# Altium PCB 2_iip_rbf.PcbDoc
Units mm, origin at the board's own origin, x right, y up, seen from the top; angles counter-clockwise.
Board outline 67.5 x 28 mm, 2 copper layers (Top Layer, Bottom Layer), stack 1.571 mm thick; 16 components, 13 nets, 74 pads, 8 vias.
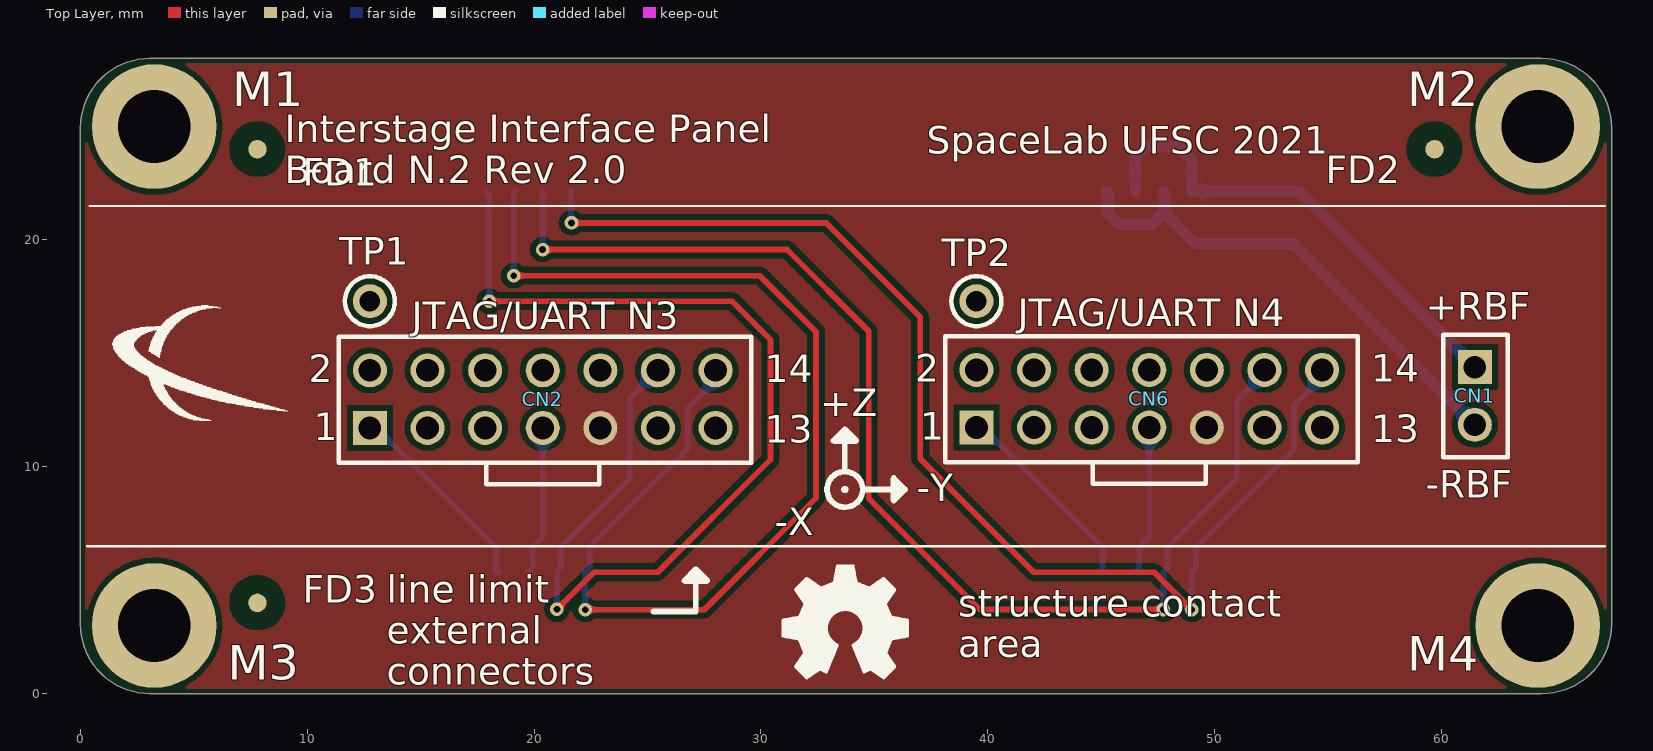
[diagram p0: Top Layer view]
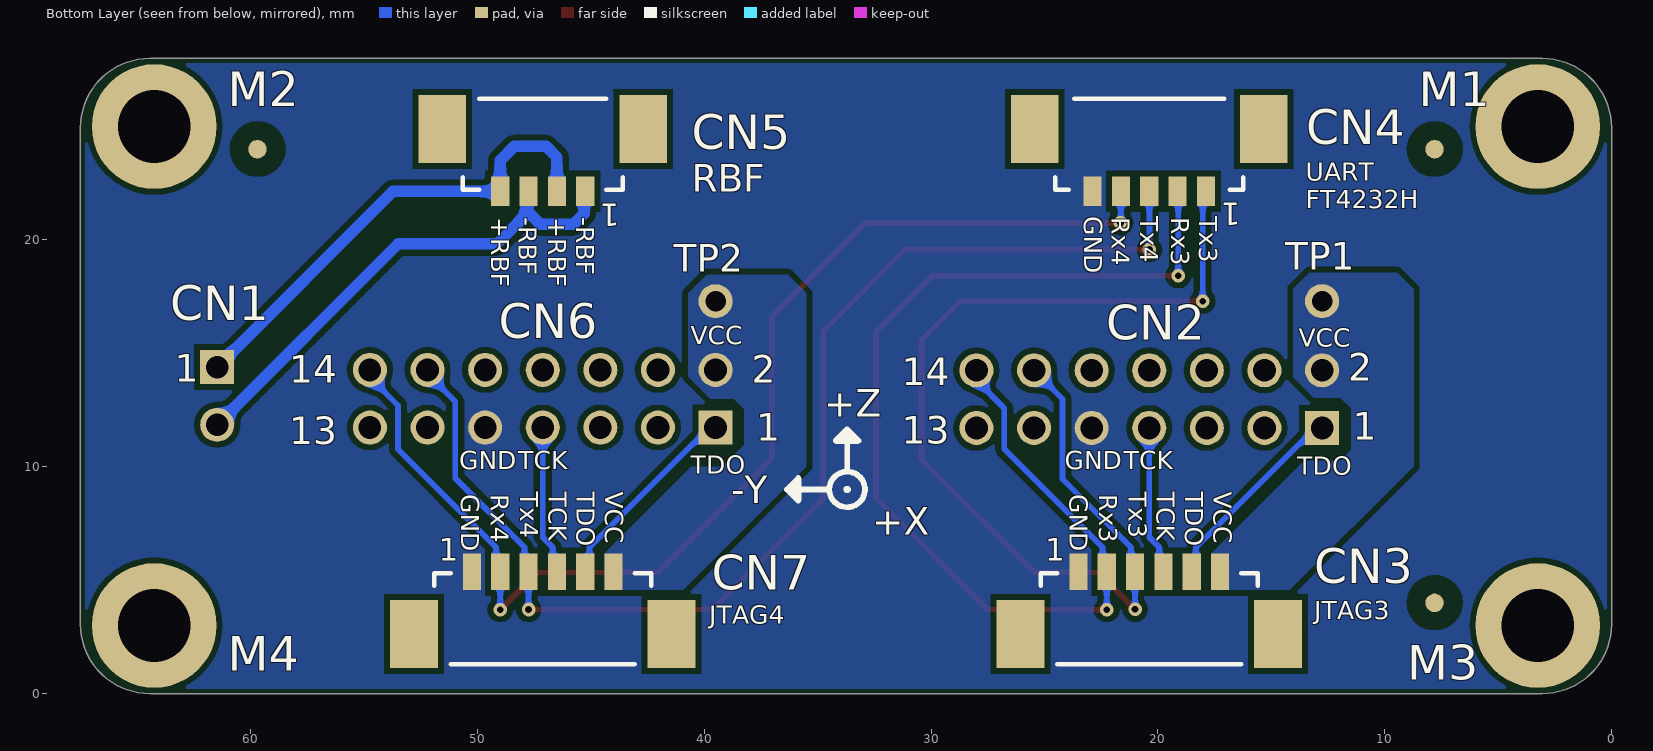
[diagram p1: Bottom Layer view, seen from below]
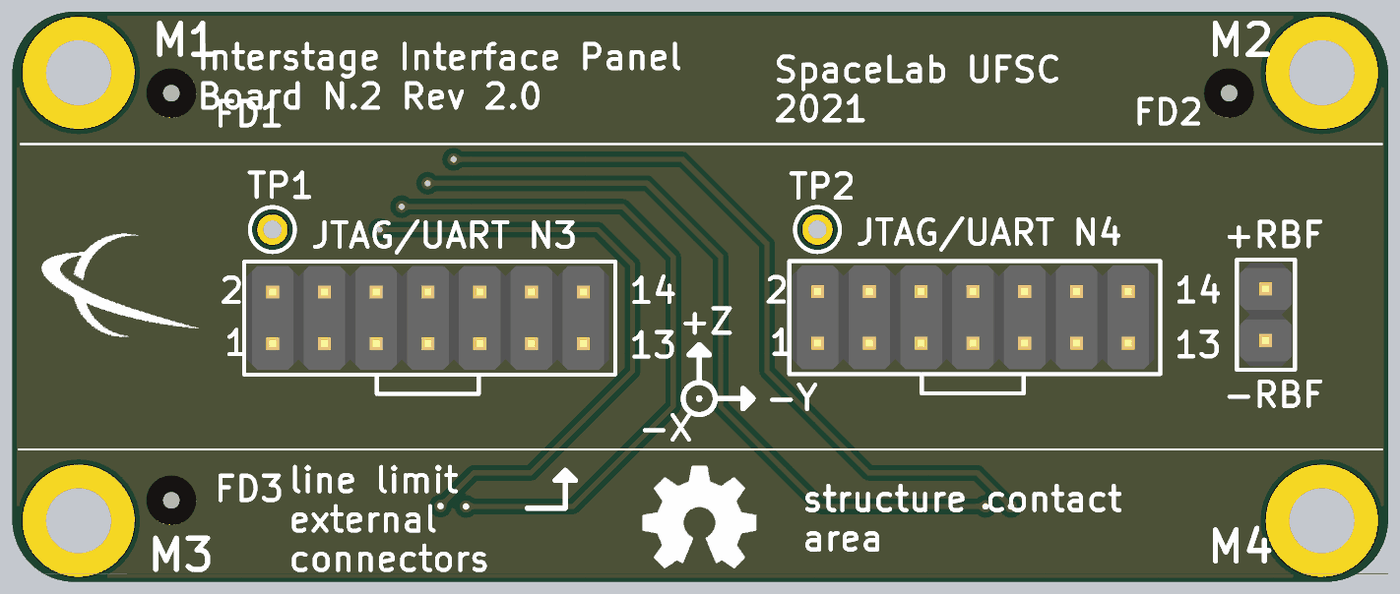
[diagram p2: 3D render of the assembled board from above, using the file's embedded part models]
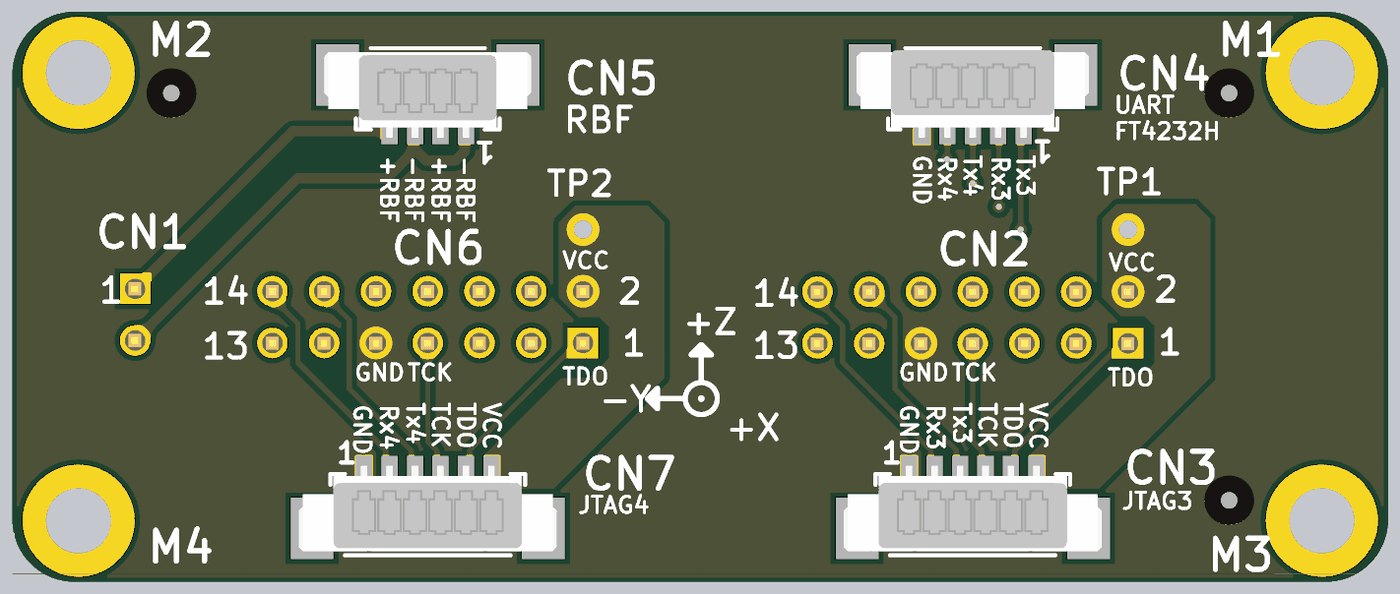
[diagram p3: 3D render of the assembled board from below, using the file's embedded part models]

## Layer stack, top to bottom
Top Solder: solder mask 0.0102, Solder Resist, Dk 3.5
Top Layer: signal copper 0.0356
Dielectric 1: dielectric 1.5, FR-4, Dk 4.8
Bottom Layer: signal copper 0.0356
Bottom Solder: solder mask 0.0102, Solder Resist, Dk 3.5

## Board outline
0,3.048 ccw(c3.048,3.048) 3.048,0 64.452,0 ccw(c64.452,3.048) 67.5,3.048 67.5,24.952 ccw(c64.452,24.952) 64.452,28 3.048,28 ccw(c3.048,24.952) 0,24.952

## Design rules (kind name [scope] priority, off if disabled: settings)
BoardOutlineClearance BoardOutlineClearance_JLCPCB [All] p1: gap=0.2 ignorepadtopadclearanceinfootprint=FALSE
BoardOutlineClearance [All] p2: gap=0.254 ignorepadtopadclearanceinfootprint=FALSE except(0: Arc-SplitContinuation Track-SplitContinuation SMDPad-SplitContinuation THPad-SplitContinuation Via-SplitContinuation Fill-SplitContinuation Poly-SplitContinuation Region-SplitContinuation Text-SplitContinuation)
Clearance Clearance_JLCPCB_capabilities [All] p1: gap=0.254 ignorepadtopadclearanceinfootprint=FALSE except(0: SMDPad-Hole THPad-Hole Via-Hole Fill-Hole Poly-Hole Region-Hole Text-Hole; 0.127: Arc-Arc Arc-Track Track-Track SMDPad-SMDPad; 0.15: SMDPad-Text THPad-Text; 0.152: SMDPad-THPad; 0.2: Arc-SMDPad Track-SMDPad; 0.33: Arc-THPad Track-THPad; 0.54: THPad-THPad) // Minimal clearances considering JLCPCB manufacturing
Clearance [All] p2: gap=0.254 ignorepadtopadclearanceinfootprint=FALSE except(0: Arc-Hole Track-Hole SMDPad-Hole THPad-Hole Via-Hole Fill-Hole Poly-Hole Region-Hole Text-Hole) // Default altium designer clearence rule
HoleSize HoleSize_JLCPCB_capabilities [All] p1: absolutevalues=TRUE maxlimit=6.3 minlimit=0.3 maxpercent=80.000 minpercent=20.000
HoleSize [All] p2: absolutevalues=TRUE maxlimit=2.54 minlimit=0.025 maxpercent=80.000 minpercent=20.000
HoleToHoleClearance HoleToHoleClearance_JLCPCB [All] p1: gap=0.54 allowstackedmicrovias=TRUE
HoleToHoleClearance [All] p2: gap=0.254 allowstackedmicrovias=TRUE
MinimumAnnularRing AnnularRing_JLCPCB_1oz_capabilities [All] p1: minimumring=0.13
MinimumAnnularRing [All] p2: minimumring=0.254
MinimumSolderMaskSliver MinimumSolderMaskSliver_JLCPCB [All] p1: minsoldermaskwidth=0.2
MinimumSolderMaskSliver [All] p2: minsoldermaskwidth=0.254
PolygonConnect PolygonConnect_GND [InNet('GND')] p1: connectstyle=Direct reliefconductorwidth=0.254 reliefentries=4 polygonreliefangle="90 Angle" airgapwidth=0.254
PolygonConnect PolygonConnect_Power [(InNet('JTAG3_VCC') OR InNet('JTAG4_VCC'))] p2: connectstyle=Direct reliefconductorwidth=0.254 reliefentries=4 polygonreliefangle="90 Angle" airgapwidth=0.254 // Power polygons for power nets (debugger and battery charger)
PolygonConnect [All] p3: connectstyle=Relief reliefconductorwidth=0.254 reliefentries=4 polygonreliefangle="90 Angle" airgapwidth=0.254
RoutingVias RoutingVias_JLCPCB_capabilities [All] p1: holewidth=0.3 width=0.6 viastyle="Through Hole" minholewidth=0.3 minwidth=0.6 maxholewidth=0.711 maxwidth=1.27
RoutingVias [All] p2: holewidth=0.711 width=1.27 viastyle="Through Hole" minholewidth=0.711 minwidth=1.27 maxholewidth=0.711 maxwidth=1.27
SilkToSolderMaskClearance SilkToSolderMaskClearance_JLCPCB [IsPad] p1: minsilkscreentomaskgap=0.15 clearancetoexposedcopper=TRUE
SilkToSolderMaskClearance [IsPad] p2: minsilkscreentomaskgap=0.254 clearancetoexposedcopper=TRUE
SolderMaskExpansion SolderMaskExpansion_JLCPCB [All] p1: expansion=0.05
SolderMaskExpansion [All] p2: expansion=0.102
Width Width_JLCPCB_capabilities [All] p1: maxlimit=0.508 minlimit=0.127 preferedwidth=0.254 minimp=50.000000 maximp=50.000000 favimp=50.000000 // Width considering JLCPCB manufacturing
Width [All] p2: maxlimit=0.254 minlimit=0.254 preferedwidth=0.254
26 further rules are at their usual default settings.

## Classes and differential pairs
component class 0_Architecture: FD1 FD2 FD3 M1 M2 M3 M4
component class 2_iip_rbf: CN1 CN2 CN3 CN4 CN5 CN6 CN7 CN13 TP1 TP2

## Components (designator, comment, footprint, x,y, rotation, side; value= is the part's Value field where it differs from the comment)
CN1 "2 POS Pin Header" "CONN HEADER VERT 2POS 2.54mm" 61.475,13.12 r270 top
CN2 "7 POS dual line Pin Header 2.54mm" "CONN HEADER VERT 14POS 2.54MM" 20.38,12.98 r0 top
CN3 "6 pin Picoblade" "PICO BLADE 0533980671" 20.38,4 r180 bottom
CN4 "5 pin PicoBlade" "PICO BLADE 0533980571" 20.38,23.516 r0 bottom
CN5 "4 pin Picoblade" "PICO BLADE 0533980471" 47.12,23.516 r0 bottom value=0533980471
CN6 "7 POS dual line Pin Header 2.54mm" "CONN HEADER VERT 14POS 2.54MM" 47.12,13 r0 top
CN7 "6 pin Picoblade" "PICO BLADE 0533980671" 47.12,4 r180 bottom
FD1 "Fiducial 1.3" "FIDUCIAL 1.3MM" 7.8,24 r0 top
FD2 "Fiducial 1.3" "FIDUCIAL 1.3MM" 59.7,24 r0 top
FD3 "Fiducial 1.3" "FIDUCIAL 1.3MM" 7.8,4 r0 top
M1 "IB Mechanical Hole" "M3 hole (5.5mm pad)"#1 3.25,25 r0 top
M2 "IB Mechanical Hole" "M3 hole (5.5mm pad)"#1 64.25,25 r0 top
M3 "IB Mechanical Hole" "M3 hole (5.5mm pad)"#2 3.25,2 r0 top
M4 "IB Mechanical Hole" "M3 hole (5.5mm pad)"#2 64.25,2 r0 top
TP1 "DNP" "TEST POINT PTH" 12.76,17.301 r0 top
TP2 "DNP" "TEST POINT PTH" 39.5,17.301 r0 top

## Footprints (in the part's own frame and the unit in brackets; to place one, negate y for a bottom-side part, rotate by r counter-clockwise, add the part's x,y. Pads: shape width x height; smd on the part's side, far side on the other; paste and mask are expansions set on the pad)
"CONN HEADER VERT 2POS 2.54mm" [mm]
  rect 1.5x1.5 hole 1: 1(-1.27,0)
  round 1.5 hole 1: 2(1.27,0)
  silkscreen extent -2.7,-1.4 2.7,1.45, body extent -2.54,-1.25 2.54,1.29, height 8.65
"CONN HEADER VERT 14POS 2.54MM" [mm]
  rect 1.5x1.5 hole 1: 1(-7.62,-1.27)
  round 1.5 hole 1: 2(-7.62,1.27) 3(-5.08,-1.27) 4(-5.08,1.27) 5(-2.54,-1.27) 6(-2.54,1.27) 7(0,-1.27) 8(0,1.27) 9(2.54,-1.27) 10(2.54,1.27) 11(5.08,-1.27) 12(5.08,1.27) 13(7.62,-1.27) 14(7.62,1.27)
  silkscreen extent -9,-2.8 9.2,2.75, body extent -8.88,-2.55 8.9,2.53, height 8.65
"FIDUCIAL 1.3MM" [mil]
  round 32 smd far side: ""(0,0)
  round 32 on Bottom Solder: ""(0,0)
  round 32 smd: ""(0,0)
  Top Layer pour cut-out: -48.23,-6.89 -45.31,17.58 -30.69,37.43 -8.18,47.47 16.35,45.09 36.52,30.91 47.05,8.63 45.22,-15.95 31.5,-36.42 31.5,-36.42 8.41,-46.85 -16.81,-44.45 -37.51,-29.85 -48.23,-6.89
  Bottom Layer pour cut-out: -48.23,-6.89 -45.31,17.58 -30.69,37.43 -8.18,47.47 16.35,45.09 36.52,30.91 47.05,8.63 45.22,-15.95 31.5,-36.42 31.5,-36.42 8.41,-46.85 -16.81,-44.45 -37.51,-29.85 -48.23,-6.89
"M3 hole (5.5mm pad)"#1 [mm]
  round 5.5 hole 3.2: 0(0,0)
"M3 hole (5.5mm pad)"#2 [mm]
  round 5.5 hole 3.2: 0(0,1)
"PICO BLADE 0533980471" [mm]
  rect 2.1x3 smd: 0(-4.425,-1.375) 0(4.425,-1.375)
  rect 0.8x1.3 smd: 1(-1.875,1.375) 2(-0.625,1.375) 3(0.625,1.375) 4(1.875,1.375)
  silkscreen extent -3.52,-2.7 3.52,1.3, body extent -5.07,-2.5 5.07,1.7, height 5.88
"PICO BLADE 0533980571" [mm]
  rect 2.1x3 smd: 0(-5.05,-1.375) 0(5.05,-1.375)
  rect 0.8x1.3 smd: 1(-2.5,1.375) 2(-1.25,1.375) 3(0,1.375) 4(1.25,1.375) 5(2.5,1.375)
  silkscreen extent -4.15,-2.7 4.15,1.3, body extent -5.7,-2.6 5.7,1.7, height 5.87
"PICO BLADE 0533980671" [mm] "CONN HEADER SMD 6POS 1.25MM"
  rect 2.1x3 smd: 0(-5.675,-1.375) 0(5.675,-1.375)
  rect 0.8x1.6 smd: 1(-3.125,1.375) 2(-1.875,1.375) 3(-0.625,1.375) 4(0.625,1.375) 5(1.875,1.375) 6(3.125,1.375)
  silkscreen extent -4.77,-2.7 4.77,1.3, body extent -6.32,-2.5 6.32,1.7, height 5.87
"TEST POINT PTH" [mm]
  round 1.5 hole 0.9: 1(0,0)
  silkscreen extent -1.1,-1.1 1.1,1.1

## Part data
CN1: library part M20-9990245, "M20 HDR, PIN, SIL, VERT, 2W", Case/Package=SIL, Color=Black, Contact Resistance=25mR, Current=3A, Insulation Resistance=10GR, Manufacturer=Harwin, Max Operating Temperature=105°C, Min Operating Temperature=-40°C, Package Quantity=1000, Supplier Part Number 1=952-2261-ND, Voltage=50V, Voltage Rating (AC)=750V, ComponentLink1Description=http://www.farnell.com/datasheets/2368211.pdf?src-supplier=Element14, ComponentLink1URL=http://www.farnell.com/datasheets/2368211.pdf?src-supplier=Element14, ComponentLink2Description=http://uk.rs-online.com/webdocs/1388/0900766b81388728.pdf?src-supplier=RSComponents, ComponentLink2URL=http://uk.rs-online.com/webdocs/1388/0900766b81388728.pdf?src-supplier=RSComponents, ComponentLink3Description=https://cdn.harwin.com/pdfs/Harwin_PC_Connectors_M20.pdf?src-supplier=Digi-Key, ComponentLink3URL=https://cdn.harwin.com/pdfs/Harwin_PC_Connectors_M20.pdf?src-supplier=Digi-Key, ComponentLink4Description=http://www.mouser.com/ds/2/181/Harwin_Product_Catalog_page_206-1134556.pdf?src-supplier=Mouser, ComponentLink4URL=http://www.mouser.com/ds/2/181/Harwin_Product_Catalog_page_206-1134556.pdf?src-supplier=Mouser, Connector Type="Male Pin", Contact Material=Brass,Bronze, Contact Mating Length=0.24inch, Contact Plating=Gold, Current Rating=3A, Depth=2.54mm, Gender=Male, Height=0.12inch, Housing Color=Black, Housing Material=Nylon, Lead Pitch=2.54mm, Length=5.08mm, Manufacturer Part Number=M20-9990245, Mating Cycles=300, Max Current Rating=3A, Mount="Through Hole", Number of Contacts=2, Number of Poles=2, Number of Positions=2, Number of Rows=1, Orientation=Straight, Packaging=Bag, Pitch=2.54mm, Pricing 1="1=0.15, 10=0.136, 100=0.0841, 500=0.0696, 1000=0.0609, 5000=0.0522, 10000=0.05075 (USD)", Pricing 2="1=0.14, 10=0.083, 100=0.069, 1000=0.06, 2000=0.052, 10000=0.05 (USD)", Radiation Hardening=No, REACH SVHC="No SVHC", Stock 1=27298, Stock 2=26881, Supplier 1=Digi-Key, Supplier 2=Mouser, Supplier Part Number 2=855-M20-9990245, Termination=Solder, Weight=0.25lb, Width=0.25inch, Working Voltage=750V
CN2 CN6: library part M20-9980745, "Headers & Wire Housings 07+07 DIL VERTICAL PIN HEADER GOLD HT", Color=Black, Contact Resistance=25mR, Manufacturer=Harwin, Max Current Rating=3A, Max Operating Temperature=105°C, Min Operating Temperature=-40°C, Package Quantity=500, Supplier Part Number 1=952-1932-ND, ComponentLink1Description=https://www.verical.com/server-webapp/html/getDatasheet?partID=468550&src-supplier=Verical, ComponentLink1URL=https://www.verical.com/server-webapp/html/getDatasheet?partID=468550&src-supplier=Verical, ComponentLink2Description=http://www.harwin.com/include/downloads/drawings/M20-998.PDF?src-supplier=Element14, ComponentLink2URL=http://www.harwin.com/include/downloads/drawings/M20-998.PDF?src-supplier=Element14, ComponentLink3Description=http://www.mouser.com/ds/2/181/M20-998-351176.pdf?src-supplier=Mouser, ComponentLink3URL=http://www.mouser.com/ds/2/181/M20-998-351176.pdf?src-supplier=Mouser, Connector Type="Male Pin", Contact Material=Brass, Contact Mating Length=0.24inch, Contact Plating=Gold, Depth=5.08mm, Gender=Male, Housing Color=Black, Housing Material=Nylon, Length=17.78mm, Manufacturer Part Number=M20-9980745, Mount="Through Hole", Number of Contacts=14, Number of Positions=14, Number of Rows=2, Orientation=Straight, Packaging=Bag, Pitch=2.54mm, Pricing 1="1=0.54, 10=0.51, 100=0.391, 500=0.34, 1000=0.2805, 5000=0.2465, 10000=0.2295 (USD)", Pricing 2="1=0.54, 10=0.51, 100=0.387, 500=0.34, 1000=0.28, 2500=0.246 (USD)", Radiation Hardening=No, REACH SVHC="No SVHC", Row Spacing=0.1inch, Stock 1=15564, Stock 2=1790, Supplier 1=Digi-Key, Supplier 2=Mouser, Supplier Part Number 2=855-M20-9980745, Termination=Solder
CN3 CN7: library part 53398-0671, "1.25mm Pitch PicoBlade™ Header, Surface Mount, Vertical, 6 Circuits", Color=Natural, Contact Resistance=20mR, Current Rating=1A, Flammability Rating="UL94 V-0", Insulation Resistance=100MR, Manufacturer=Molex, Max Operating Temperature=85°C, Min Operating Temperature=-40°C, Package Quantity=1000, Supplier Part Number 1=WM7610DKR-ND, Voltage Rating=125V, Body Plating=Tin, ComponentLink1Description=https://www.molex.com/pdm_docs/sd/533980671_sd.pdf?src-supplier=Digi-Key, ComponentLink1URL=https://www.molex.com/pdm_docs/sd/533980671_sd.pdf?src-supplier=Digi-Key, Contact Material=Bronze,Tin, Contact Plating=Tin, Gender=Male, Glow Wire Compliant=Non-compliant, Housing Color=Natural, Housing Material=Nylon, Lead Free="Lead Free", Lead Pitch=1.25mm, Manufacturer Part Number=53398-0671, Mount="Surface Mount", Number of Circuits=6, Number of Contacts=6, Number of Positions=6, Number of Rows=1, Orientation=Vertical, Packaging="Tape and Reel", Pitch=1.25mm, Pricing 1="1=1.39, 10=1.26, 100=1.0802, 500=0.90014 (USD)", Pricing 2="1=1.15, 10=1.01, 100=0.864, 500=0.727, 1000=0.427, 2000=0.374 (USD)", Radiation Hardening=No, REACH SVHC=Unknown, Stock 1=21086, Stock 2=26, Supplier 1=Digi-Key, Supplier 2=Mouser, Supplier Part Number 2=538-53398-0671, Termination=Solder, Voltage Rating (AC)=125V, Voltage Rating (DC)=125V, Working Voltage=125V
CN4: library part 53398-0571, "Wire-To-Board Connector, Vertical, PicoBlade 53398 Series, Surface Mount, Header, 5, 1.25 mm", Color=Natural, Contact Resistance=20mR, Current Rating=1A, Flammability Rating="UL94 V-0", Insulation Resistance=100MR, Manufacturer=Molex, Max Operating Temperature=85°C, Max Voltage Rating (AC)=125V, Min Operating Temperature=-40°C, Package Quantity=1000, Supplier Part Number 1=WM7609CT-ND, Body Plating=Tin, ComponentLink1Description=http://www.molex.com/webdocs/datasheets/pdf/en-us/0533980571_PCB_HEADERS.pdf?src-supplier=Avnet+Europe, ComponentLink1URL=http://www.molex.com/webdocs/datasheets/pdf/en-us/0533980571_PCB_HEADERS.pdf?src-supplier=Avnet+Europe, ComponentLink2Description=http://www.farnell.com/datasheets/2697810.pdf?src-supplier=Newark, ComponentLink2URL=http://www.farnell.com/datasheets/2697810.pdf?src-supplier=Newark, ComponentLink3Description=https://www.distrelec.biz/Web/Downloads/46/_e/gf116833-116846_e.pdf?mime=application%2Fpdf&src-supplier=Distrelec, ComponentLink3URL=https://www.distrelec.biz/Web/Downloads/46/_e/gf116833-116846_e.pdf?mime=application%2Fpdf&src-supplier=Distrelec, ComponentLink4Description=http://www.farnell.com/datasheets/1632115.pdf?src-supplier=Element14, ComponentLink4URL=http://www.farnell.com/datasheets/1632115.pdf?src-supplier=Element14, ComponentLink5Description=http://uk.rs-online.com/webdocs/078f/0900766b8078fc92.pdf?src-supplier=RSComponents, ComponentLink5URL=http://uk.rs-online.com/webdocs/078f/0900766b8078fc92.pdf?src-supplier=RSComponents, ComponentLink6Description=http://www.farnell.com/datasheets/1867377.pdf?src-supplier=Element14, ComponentLink6URL=http://www.farnell.com/datasheets/1867377.pdf?src-supplier=Element14, ComponentLink7Description=http://www.farnell.com/datasheets/1626108.pdf?src-supplier=Element14, ComponentLink7URL=http://www.farnell.com/datasheets/1626108.pdf?src-supplier=Element14, ComponentLink8Description=http://www.mouser.com/ds/2/276/0533980571_PCB_HEADERS-146486.pdf?src-supplier=Mouser, ComponentLink8URL=http://www.mouser.com/ds/2/276/0533980571_PCB_HEADERS-146486.pdf?src-supplier=Mouser, Contact Gender=Male, Contact Material=Bronze,Tin,Brass, Contact Plating=Tin, Gender=Male, Glow Wire Compliant=Non-compliant, Housing Color=Natural, Housing Material=Nylon, Lead Free="Lead Free", Lead Pitch=1.25mm, Manufacturer Part Number=53398-0571, Mount="Surface Mount", Number of Circuits=5, Number of Contacts=5, Number of Positions=5, Number of Rows=1, Orientation=Vertical, Packaging="Tape and Reel", Pitch=1.25mm, Pricing 1="1=1.32, 10=1.159, 100=0.9999, 500=0.81814 (USD)", Pricing 2="1=1.32, 10=1.15, 100=0.999, 500=0.818, 1000=0.389, 2000=0.342 (USD)", Radiation Hardening=No, REACH SVHC=Unknown, Stock 1=427, Stock 2=35606, Supplier 1=Digi-Key, Supplier 2=Mouser, Supplier Part Number 2=538-53398-0571, Termination=Solder, Voltage Rating=125V, Voltage Rating (AC)=125V, Voltage Rating (DC)=125V, Working Voltage=125V
CN5: library part 0533980471, "Connector Header Surface Mount 4 position 0.049\" (1.25mm)", Color=Natural, Contact Resistance=20mR, Current Rating=1A, Flammability Rating="UL94 V-0", Insulation Resistance=100MR, Manufacturer=Molex, Manufacturer Part Number=53398-0471, Max Operating Temperature=85°C, Min Operating Temperature=-40°C, Package Quantity=1000, Supplier Part Number 1=WM7608CT-ND, Voltage Rating=125V, Body Plating=Tin, ComponentLink1Description=http://www.mouser.com/ds/2/276/0533980471_PCB_HEADERS-171069.pdf?src-supplier=Mouser, ComponentLink1URL=http://www.mouser.com/ds/2/276/0533980471_PCB_HEADERS-171069.pdf?src-supplier=Mouser, ComponentLink2Description=http://www.jameco.com/Jameco/Products/ProdDS/1932627.pdf?src-supplier=Jameco, ComponentLink2URL=http://www.jameco.com/Jameco/Products/ProdDS/1932627.pdf?src-supplier=Jameco, ComponentLink3Description=https://www.distrelec.biz/Web/Downloads/46/_e/gf116833-116846_e.pdf?mime=application%2Fpdf&src-supplier=Distrelec, ComponentLink3URL=https://www.distrelec.biz/Web/Downloads/46/_e/gf116833-116846_e.pdf?mime=application%2Fpdf&src-supplier=Distrelec, ComponentLink4Description=http://www.molex.com/webdocs/datasheets/pdf/en-us/0533980471_PCB_HEADERS.pdf?src-supplier=Element14, ComponentLink4URL=http://www.molex.com/webdocs/datasheets/pdf/en-us/0533980471_PCB_HEADERS.pdf?src-supplier=Element14, ComponentLink5Description=http://www.farnell.com/datasheets/1867381.pdf?src-supplier=Element14, ComponentLink5URL=http://www.farnell.com/datasheets/1867381.pdf?src-supplier=Element14, ComponentLink6Description=http://uk.rs-online.com/webdocs/13c4/0900766b813c4500.pdf?src-supplier=RSComponents, ComponentLink6URL=http://uk.rs-online.com/webdocs/13c4/0900766b813c4500.pdf?src-supplier=RSComponents, ComponentLink7Description=http://www.molex.com/webdocs/datasheets/pdf/en-us/0533980471_PCB_HEADERS.pdf?src-supplier=Farnell, ComponentLink7URL=http://www.molex.com/webdocs/datasheets/pdf/en-us/0533980471_PCB_HEADERS.pdf?src-supplier=Farnell, ComponentLink8Description=http://www.farnell.com/datasheets/2697809.pdf?src-supplier=Element14, ComponentLink8URL=http://www.farnell.com/datasheets/2697809.pdf?src-supplier=Element14, ComponentLink9Description=http://www.molex.com/webdocs/datasheets/pdf/en-us/0533980471_PCB_HEADERS.pdf?src-supplier=Avnet, ComponentLink9URL=http://www.molex.com/webdocs/datasheets/pdf/en-us/0533980471_PCB_HEADERS.pdf?src-supplier=Avnet, ComponentLink10Description=http://www.molex.com/webdocs/datasheets/pdf/en-us/0533980471_PCB_HEADERS.pdf?src-supplier=Avnet+Europe, ComponentLink10URL=http://www.molex.com/webdocs/datasheets/pdf/en-us/0533980471_PCB_HEADERS.pdf?src-supplier=Avnet+Europe, Contact Material=Bronze,Tin,Brass, Contact Plating=Tin, Gender=Male, Glow Wire Compliant=Non-compliant, Housing Color=Natural, Housing Material=Nylon, Lead Free="Lead Free", Lead Pitch=1.25mm, Mount="Surface Mount", Mount Type=SMD, N of Positions=4, Number of Circuits=4, Number of Contacts=4, Number of Positions=4, Number of Rows=1, Orientation=Vertical, Packaging="Tape and Reel", Pitch=1.25mm, Pricing 1="1=1.19, 10=1.044, 100=0.901, 500=0.73716 (USD)", Pricing 2="1=0.98, 10=0.832, 100=0.716, 500=0.6, 1000=0.391, 2000=0.342 (USD)", Radiation Hardening=No, REACH SVHC=Unknown, Stock 1=21236, Stock 2=43680, Supplier 1=Digi-Key, Supplier 2=Mouser, Supplier Part Number 2=538-53398-0471, Termination=Solder, Voltage Rating (AC)=125V, Voltage Rating (DC)=125V, Working Voltage=125V
FD1 FD2 FD3: "Fiducial 1.3mm"
M1 M2 M3 M4: "Mechanical Hole for FloripaSat-2 interface boards"
TP1 TP2: library part "Test Point PTH", "TEST POINT PAD"

## Via types
v1: diameter 0.6, hole 0.3, Top Layer to Bottom Layer, tented both sides, 8 vias

## Nets (pads, with @x,y where several pads share a name; then routed paths per layer and width w, separated by ;. In a path a pad name is that pad's centre, name@x,y a point inside that pad or via, vN(x,y) a via of type N, cw(c..) or ccw(c..) an arc to the next point about the centre after c; other vN are vias at no path point)
+RBF: CN1.1 CN5.2 CN5.4 | length 21.5
  Bottom Layer w0.508: CN5.2 46.495,23.65 46.97,24.125 48.375,24.125 48.995,23.505 CN5.4 53.724,22.141 CN1.1
-RBF: CN1.2 CN5.1 CN5.3 | length 22.4
  Bottom Layer w0.508: CN5.1 45.301,22.085 45.301,21.162 45.766,20.697 47.224,20.697 47.689,21.162 47.801,21.162 ; CN5.3 47.801,22.085 47.801,21.162 ; CN1.2 53.5,19.825 49.138,19.825 47.801,21.162
GND: CN2.9 CN3.1 CN4.5 CN6.9 CN7.1
JTAG3_TCK: CN2.7 CN3.4 | length 6.6
  Bottom Layer w0.254: CN3.4 19.938,5.558 19.938,6.451 20.38,6.893 CN2.7
JTAG3_TDO_TDI: CN2.1 CN3.5 | length 9
  Bottom Layer w0.254: CN2.1 13.063,11.71 18.322,6.451 18.322,5.375 CN3.5
JTAG3_VCC: CN2.2 CN3.6 TP1.1
JTAG4_TCK: CN6.7 CN7.4 | length 6.6
  Bottom Layer w0.254: CN7.4 46.678,5.558 46.678,6.451 47.12,6.893 CN6.7
JTAG4_TDO_TDI: CN6.1 CN7.5 | length 9
  Bottom Layer w0.254: CN6.1 39.783,11.73 45.062,6.451 45.062,5.375 CN7.5
JTAG4_VCC: CN6.2 CN7.6 TP2.1
UART_Rx3: CN2.14 CN3.2 CN4.2 | length 50.5
  Top Layer w0.254: v1(19.1,18.425) 29.95,18.425 32.425,15.95 32.425,8.625 27.5,3.7 v1(22.255,3.7)
  Bottom Layer w0.254: v1(19.1,18.425) 19.1,22.111 CN4.2 ; v1(22.255,3.7) CN3.2 22.438,5.558 22.438,6.451 26.775,10.788 26.775,12.575 28,13.8 CN2.14
UART_Rx4: CN4.4 CN6.14 CN7.2 | length 52.4
  Top Layer w0.254: v1(21.65,20.75) 32.875,20.75 37.025,16.6 37.025,10.35 42.025,5.35 47.345,5.35 v1(48.995,3.7)
  Bottom Layer w0.254: CN4.4 21.63,20.77 v1(21.65,20.75) ; v1(48.995,3.7) CN7.2 49.178,5.558 49.178,6.451 53.5,10.773 53.5,12.7 54.74,13.94 CN6.14
UART_Tx3: CN2.12 CN3.3 CN4.1 | length 47.8
  Top Layer w0.254: v1(18.025,17.3) 28.725,17.3 30.425,15.6 30.425,10.325 25.45,5.35 22.635,5.35 v1(21.005,3.72)
  Bottom Layer w0.254: CN4.1 17.875,22.136 18.025,21.986 v1(18.025,17.3) ; v1(21.005,3.72) CN3.3 21.188,5.558 21.188,6.451 24.2,9.463 24.2,12.99 CN2.12
UART_Tx4: CN4.3 CN6.12 CN7.3 | length 53.2
  Top Layer w0.254: v1(20.375,19.575) 31.15,19.575 34.75,15.975 34.75,8.6 39.645,3.705 v1(47.745,3.705)
  Bottom Layer w0.254: v1(20.375,19.575) 20.375,22.136 CN4.3 ; v1(47.745,3.705) CN7.3 47.928,5.558 47.928,6.451 50.975,9.498 50.975,12.875 52.2,14.1 CN6.12
pads on no net: CN2.3 CN2.4 CN2.5 CN2.6 CN2.8 CN2.10 CN2.11 CN2.13 CN3.0 CN4.0 CN5.0 CN6.3 CN6.4 CN6.5 CN6.6 CN6.8 CN6.10 CN6.11 CN6.13 CN7.0 FD1. FD2. FD3. M1.0 M2.0 M3.0 M4.0

## Polygon pours and split planes (outlines as drawn)
GND on Bottom Layer "Top Layer-GND" (solid, remove dead copper, pour order 20): 0,24.952 cw(c3.048,24.952) 3.048,28 64.452,28 cw(c64.452,24.952) 67.5,24.952 67.5,3.048 cw(c64.452,3.048) 64.452,0 3.048,0 cw(c3.048,3.048) 0,3.048
JTAG3_VCC on Bottom Layer "Bottom Layer-JTAG3_VCC" (solid, pour order 18): 8.725,10.025 14.175,4.575 17.65,4.575 17.65,6.175 13.55,10.275 11.95,10.275 11.475,10.75 11.475,12.575 11.95,13.05 13.125,13.05 14.025,13.95 14.025,17.85 13.325,18.55 9.45,18.55 8.725,17.825
JTAG4_VCC on Bottom Layer "Bottom Layer-JTAG4_VCC" (solid, pour order 14): 38.225,12.525 38.7,13 39.725,13 40.7,13.975 40.7,17.658 39.883,18.475 36.325,18.475 35.5,17.65 35.5,10 40.925,4.575 44.4,4.575 44.4,6.175 40.575,10 39.2,10 38.225,10.975
GND on Top Layer "Top Layer-GND" (solid, remove dead copper, pour order 12): 0,24.952 cw(c3.048,24.952) 3.048,28 64.452,28 cw(c64.452,24.952) 67.5,24.952 67.5,3.048 cw(c64.452,3.048) 64.452,0 3.048,0 cw(c3.048,3.048) 0,3.048

## Other copper
Top Layer:
  text "'.Layer_Name'" at 177.571,-11.538 h2.5
Bottom Layer:
  text "'.Layer_Name'" at 177.571,-11.538 h2.5

## Silkscreen, mask and mechanical layers (free items; w line width, h text height)
Top Overlay:
  drawing of 995 lines, arcs and shapes, not listed
  text "SpaceLab UFSC 2021" at 37.3,23.8 h1.2
  text "Interstage Interface Panel  / Board N.2 Rev 2.0" at 9,22.5 h1.2
  text "+RBF" at 59.3,16.475 h1.2
  text "JTAG/UART N4" at 41.325,16.2 h1.2
  text "JTAG/UART N3" at 14.6,16.056 h1.2
  text "2" at 36.8,13.753 h1.2
  text "14" at 56.9,13.753 h1.2
  text "2" at 10.06,13.733 h1.2
  text "14" at 30.16,13.733 h1.2
  text "+Z" at 32.61,12.225 h1.2
  text "1" at 37.031,11.188 h1.2
  text "1" at 10.291,11.168 h1.2
  text "13" at 56.9,11.07 h1.2
  text "13" at 30.16,11.05 h1.2
  text "-RBF" at 59.3,8.625 h1.2
  text "-Y" at 36.86,8.475 h1.2
  text "-X" at 30.61,6.975 h1.2
  text "structure contact / area" at 38.7,1.596 h1.2
  text "line limit  / external / connectors" at 13.5,0.4 h1.2
  text "'.Layer_Name'" at 177.571,-11.538 h2.5
Bottom Overlay:
  circle w0.254: c33.7,9 r0.035
  circle w0.254: c33.7,9 r0.785
  region: 35.725,9.5 36.225,9 35.725,8.5
  region: 33.2,11.025 33.7,11.525 34.2,11.025
  lines w0.254: 33.2,11.15 33.7,11.65 ; 33.7,9.785 33.7,11.65 ; 34.2,11.15 33.7,11.65 ; 34.485,9 36.35,9 ; 35.85,8.5 36.35,9 ; 35.85,9.5 36.35,9
  text "M1" at 8.5,25.9 h1.52
  text "M2" at 61,25.9 h1.52
  text "RBF" at 40.55,22.125 h1.2
  text "UART  / FT4232H" at 13.475,21.4 h0.8
  text "Tx3" at 18.175,21.05 h0.8 r90
  text "Tx4" at 20.775,21.05 h0.8 r90
  text "GND" at 23.25,21.05 h0.8 r90
  text "Rx3" at 19.4,21 h0.8 r90
  text "Rx4" at 22.025,21 h0.8 r90
  text "-RBF" at 45.65,21 h0.8 r90
  text "+RBF" at 46.875,21 h0.8 r90
  text "-RBF" at 48.175,21 h0.8 r90
  text "+RBF" at 49.4,21 h0.8 r90
  text "TP1" at 14.375,18.675 h1.2
  text "TP2" at 41.35,18.6 h1.2
  text "VCC" at 40.6,15.4 h0.8
  text "VCC" at 13.8,15.3 h0.8
  text "2" at 11.6,13.8 h1.2
  text "1" at 63.35,13.75 h1.2
  text "2" at 37.9,13.7 h1.2
  text "14" at 58.3,13.7 h1.2
  text "14" at 31.3,13.6 h1.2
  text "+Z" at 34.7,12.2 h1.2
  text "1" at 11.4,11.2 h1.2
  text "1" at 37.7,11.15 h1.2
  text "13" at 31.3,11.025 h1.2
  text "13" at 58.3,11 h1.2
  text "TCK" at 21.5,9.9 h0.8
  text "GND" at 24.1,9.9 h0.8
  text "TCK" at 48.2,9.9 h0.8
  text "GND" at 50.8,9.9 h0.8
  text "TDO" at 40.6,9.7 h0.8
  text "TDO" at 13.85,9.65 h0.8
  text "VCC" at 17.54,8.895 h0.8 r90
  text "TDO" at 18.79,8.895 h0.8 r90
  text "TCK" at 20.04,8.895 h0.8 r90
  text "Tx3" at 21.29,8.895 h0.8 r90
  text "VCC" at 44.36,8.895 h0.8 r90
  text "TDO" at 45.61,8.895 h0.8 r90
  text "TCK" at 46.86,8.895 h0.8 r90
  text "Tx4" at 48.11,8.895 h0.8 r90
  text "Rx3" at 22.59,8.795 h0.8 r90
  text "GND" at 23.89,8.795 h0.8 r90
  text "Rx4" at 49.41,8.795 h0.8 r90
  text "GND" at 50.71,8.795 h0.8 r90
  text "-Y" at 38.8,8.4 h1.2
  text "+X" at 32.6,7 h1.2
  text "JTAG3" at 13.1,3.275 h0.8
  text "JTAG4" at 39.775,3.075 h0.8
  text "M4" at 61,1 h1.52
  text "M3" at 9,0.6 h1.52
  text "'.Layer_Name'" at 177.571,-11.538 h2.5
Top Paste:
  text "'.Layer_Name'" at 177.571,-11.538 h2.5
Bottom Paste:
  text "'.Layer_Name'" at 177.571,-11.538 h2.5
Top Solder:
  text "'.Layer_Name'" at 177.571,-11.538 h2.5
Bottom Solder:
  text "'.Layer_Name'" at 177.571,-11.538 h2.5
Drill Guide:
  text "'.Layer_Name'" at 177.571,-11.538 h2.5
Board Edge:
  lines w0.2: 0,3.065 ccw(c3.065,3.065) 3.065,0 64.435,0 ccw(c64.435,3.065) 67.5,3.065 67.5,24.959 ccw(c64.459,24.959) 64.459,28 3.139,28 ccw(c3.139,24.861) 0,24.861 0,13.8 0,3.065
  text "'.Layer_Name'" at 193.8,-11.5 h2.5
Dimensions:
  circle w0.2: c64.25,25 r1.6
  circle w0.2: c64.25,2.975 r1.6
  circle w0.2: c3.25,3 r1.6
  circle w0.2: c3.25,25 r1.6
  region: 34.45,5.337 34.95,5.837 35.45,5.337
  lines w0.2: 0.3,6.5 67.15,6.5 ; 0.3,21.5 67.15,21.5
  lines w0.254: 33.085,4.097 34.95,4.097 34.95,5.962 ; 34.45,5.462 34.95,5.962 ; 35.45,5.462 34.95,5.962
  text "Mechanical specs:" at 13.25,30.525 h1.5
  text "structure contact area" at 20.275,23.5 h1.2
  text "external connectors area" at 18.775,13.275 h1.2
  text "structure contact area" at 35.875,4.35 h1.2
  text "(cm)" at 18.325,3.975 h1
  text "line limit  / external connectors" at 16.15,1.525 h1.2
  text "'.Layer_Name'" at 177.571,-11.538 h2.5
BOTTOM ASM:
  text "'.Layer_Name'" at 177.601,-11.533 h2.5
TOP ASM:
  text "'.Layer_Name'" at 177.571,-11.538 h2.5
Sheet:
  drawing of 228 lines, arcs and shapes, not listed
  text "1" at 8.746,161.611 h1.78
  text "2" at 81.39,161.611 h1.78
  text "3" at 154.542,161.611 h1.78
  text "4" at 227.44,161.611 h1.78
  text "A" at -25.595,138.599 h1.78
  text "A" at 261.425,138.599 h1.78
  text "B" at -25.595,90.542 h1.78
  text "B" at 261.425,90.542 h1.78
  text "Fabrication specifications:" at 139.357,54.778 h3.1
  text "Layer" at -11.532,51.819 h1.2
  text "Name" at -3.334,51.819 h1.2
  text "Material" at 15.261,51.819 h1.2
  text "Thickness" at 32.456,51.819 h1.2
  text "Constant" at 45.453,51.819 h1.2
  text "Board Layer Stack" at 56.85,51.819 h1.2
  text "1" at -11.532,49.419 h1.2
  text "Top Overlay" at -3.334,49.419 h1.2
  text "2" at -11.532,47.019 h1.2
  text "Top Solder" at -3.334,47.019 h1.2
  text "Solder Resist" at 15.261,47.019 h1.2
  text "0.010mm" at 32.456,47.019 h1.2
  text "3.5" at 45.453,47.019 h1.2
  text "3" at -11.532,44.619 h1.2
  text "Top Layer" at -3.334,44.619 h1.2
  text "Copper" at 15.261,44.619 h1.2
  text "0.036mm" at 32.456,44.619 h1.2
  text "4" at -11.532,42.219 h1.2
  text "Dielectric 1" at -3.334,42.219 h1.2
  text "FR-4" at 15.261,42.219 h1.2
  text "1.500mm" at 32.456,42.219 h1.2
  text "4.8" at 45.453,42.219 h1.2
  text "C" at -25.595,42.028 h1.78
  text "C" at 261.425,42.028 h1.78
  text "5" at -11.532,39.819 h1.2
  text "Bottom Layer" at -3.334,39.819 h1.2
  text "Copper" at 15.261,39.819 h1.2
  text "0.036mm" at 32.456,39.819 h1.2
  text "- Copper base: 1oz  / - PCB Material: Prepeg FR4-Standard / - PCB Tickness: 1.6mm / - PCB Surface: HASL (with lead)" at 139.351,37.794 h1.73
  text "- Silkscreen Color: White (top and bottom) / - Soldermask Color: Green / - Vias: Force Complete Tenting / - Stack-up: Table herein included / - Special requirements: None" at 197.051,37.794 h1.73
  text "6" at -11.532,37.419 h1.2
  text "Bottom Solder" at -3.334,37.419 h1.2
  text "Solder Resist" at 15.261,37.419 h1.2
  text "0.010mm" at 32.456,37.419 h1.2
  text "3.5" at 45.453,37.419 h1.2
  text "7" at -11.532,35.019 h1.2
  text "Bottom Overlay" at -3.334,35.019 h1.2
  text "Assembly specifications:" at 139.632,31.798 h3.1
  text "- Solder composition: Include lead / - Fiducials: 3 top and 3 bottom avaliable" at 139.626,14.804 h1.73
  text "SpaceLab - Federal University of Santa Catarina" at 170.5,-2 h2.5
  text "D" at -25.595,-5.978 h1.78
  text "D" at 261.425,-5.978 h1.78
  text "Project:" at 170.5,-6.5 h2.5
  text "Interstage Interface Panel Nº2" at 178.5,-6.5 h2.5
  text "Layer:" at 170.5,-11.5 h2.5
  text "Designed by:" at 170.5,-16.5 h2.5
  text "Project Code:" at 228.5,-16.5 h2.5
  text "IIP2" at 243,-16.5 h2.5
  text "Yan C. de Azeredo" at 184.426,-16.533 h2.5
  text "v2.0" at 208.526,-21.433 h2.5
  text "Date:" at 170.5,-21.5 h2.5
  text "'.Print_Date'" at 176.5,-21.5 h2.5
  text "Version:" at 199.5,-21.5 h2.5
  text "Size:" at 228.5,-21.5 h2.5
  text "A4" at 234.5,-21.5 h2.5
  text "1" at 8.746,-26.349 h1.78
  text "2" at 81.39,-26.349 h1.78
  text "3" at 154.542,-26.349 h1.78
  text "4" at 227.44,-26.349 h1.78
Drill Drawing:
  circle w0.2: c-16.989,70.792 r0.667
  lines w0.2: -17.656,64.125 -16.322,64.125 -16.322,65.458 -17.656,65.458 -17.656,64.125 ; -17.656,68.458 -16.322,68.458 -16.989,67.125 -17.656,68.458 ; -17.656,73.458 -17.322,73.458 -16.989,73.125 -16.656,73.458 -16.322,73.458 -16.656,73.792 -16.322,74.125 -16.656,74.125 -16.989,74.458 -17.322,74.125 -17.656,74.125 -17.322,73.792 -17.656,73.458
  lines w0.3: -18.851,63.225 123.35,63.225 ; -18.851,75.225 123.35,75.225 ; -7.834,60.225 -7.834,78.225 ; 2.963,60.225 2.963,78.225 ; 25.957,60.225 25.957,78.225 ; 36.074,60.225 36.074,78.225 ; 50.75,60.225 50.75,78.225 ; 80.741,60.225 80.741,78.225 ; 92.538,60.225 92.538,78.225 ; 107.454,60.225 107.454,78.225 ; -18.851,60.225 123.35,60.225 123.35,78.225 -18.851,78.225 -18.851,60.225
  text "Symbol" at -17.051,76.125 h1.44
  text "Count" at -6.934,76.125 h1.44
  text "Hole Size" at 3.863,76.125 h1.44
  text "Plated" at 26.857,76.125 h1.44
  text "Hole Type" at 36.974,76.125 h1.44
  text "Drill Layer Pair" at 51.65,76.125 h1.44
  text "Via/Pad" at 81.641,76.125 h1.44
  text "Pad Shape" at 93.438,76.125 h1.44
  text "Template" at 108.354,76.125 h1.44
  text "8" at -6.934,73.125 h1.2
  text "0.300mm (11.81mil)" at 3.863,73.125 h1.2
  text "PTH" at 26.857,73.125 h1.2
  text "Round" at 36.974,73.125 h1.2
  text "Top Layer - Bottom Layer" at 51.65,73.125 h1.2
  text "Via" at 81.641,73.125 h1.2
  text "Rounded" at 93.438,73.125 h1.2
  text "v60h30m0mx0" at 108.354,73.125 h1.2
  text "2" at -6.934,70.125 h1.2
  text "0.900mm (35.43mil)" at 3.863,70.125 h1.2
  text "PTH" at 26.857,70.125 h1.2
  text "Round" at 36.974,70.125 h1.2
  text "Top Layer - Bottom Layer" at 51.65,70.125 h1.2
  text "Pad" at 81.641,70.125 h1.2
  text "Rounded" at 93.438,70.125 h1.2
  text "c150h90" at 108.354,70.125 h1.2
  text "30" at -6.934,67.125 h1.2
  text "1.000mm (39.37mil)" at 3.863,67.125 h1.2
  text "PTH" at 26.857,67.125 h1.2
  text "Round" at 36.974,67.125 h1.2
  text "Top Layer - Bottom Layer" at 51.65,67.125 h1.2
  text "Pad" at 81.641,67.125 h1.2
  text "(Mixed)" at 93.438,67.125 h1.2
  text "(Mixed)" at 108.354,67.125 h1.2
  text "4" at -6.934,64.125 h1.2
  text "3.200mm (125.98mil)" at 3.863,64.125 h1.2
  text "PTH" at 26.857,64.125 h1.2
  text "Round" at 36.974,64.125 h1.2
  text "Top Layer - Bottom Layer" at 51.65,64.125 h1.2
  text "Pad" at 81.641,64.125 h1.2
  text "Rounded" at 93.438,64.125 h1.2
  text "c550h320" at 108.354,64.125 h1.2
  text "44 Total" at -6.934,61.125 h1.2
  text "'.Layer_Name'" at 177.571,-11.538 h2.5
  text "'.Layer_Name'" at 177.571,-11.538 h2.5

## Dimensions
3.25,3 to 17.575,4.675 on Dimensions
64.25,3 to 64.25,25 on Dimensions
2.95,28 to 2.95,21.5 on Dimensions
-0.275,6.5 to -0.275,21.5 on Dimensions
0,28 to 67.5,28 on Dimensions
0,0 to 0,28 on Dimensions

## Text inside footprints (layer, text, board x,y; h text height)
CN3: Bottom Overlay "1" at 24.955,5.85 h1
CN4: Bottom Overlay "1" at 16.355,21.641 h1 r180
CN5: Bottom Overlay "1" at 43.72,21.591 h1 r180
CN7: Bottom Overlay "1" at 51.695,5.85 h1